# Altium PCB BikeHUD_PCB_Rev1.PcbDoc
Units mm, origin at the board's own origin, x right, y up, seen from the top; angles counter-clockwise.
Board outline 70.5 x 60.9 mm, 2 copper layers (Top Layer, Bottom Layer); 15 components, 33 nets, 157 pads, 42 vias.
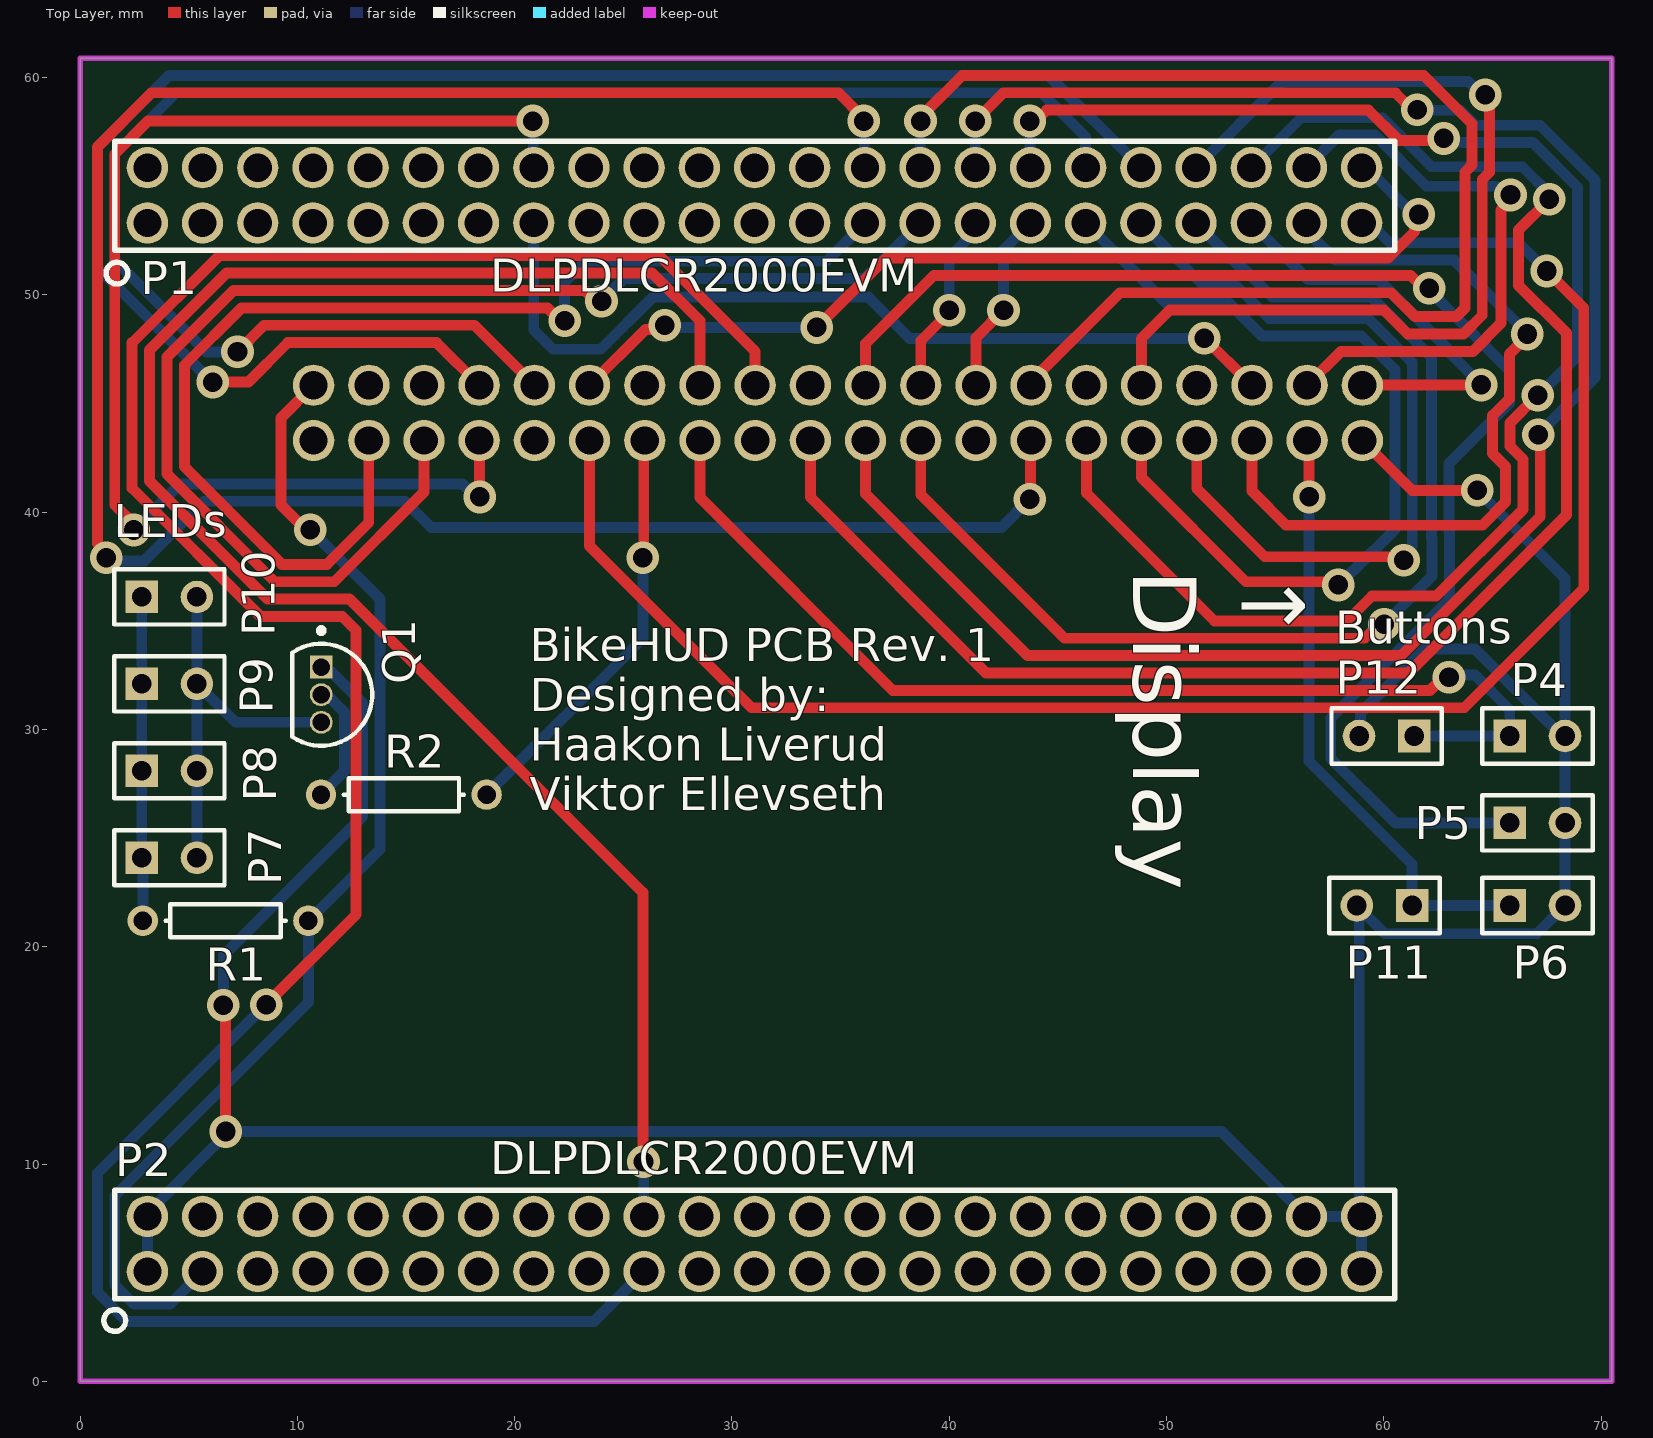
[diagram p0: Top Layer view]
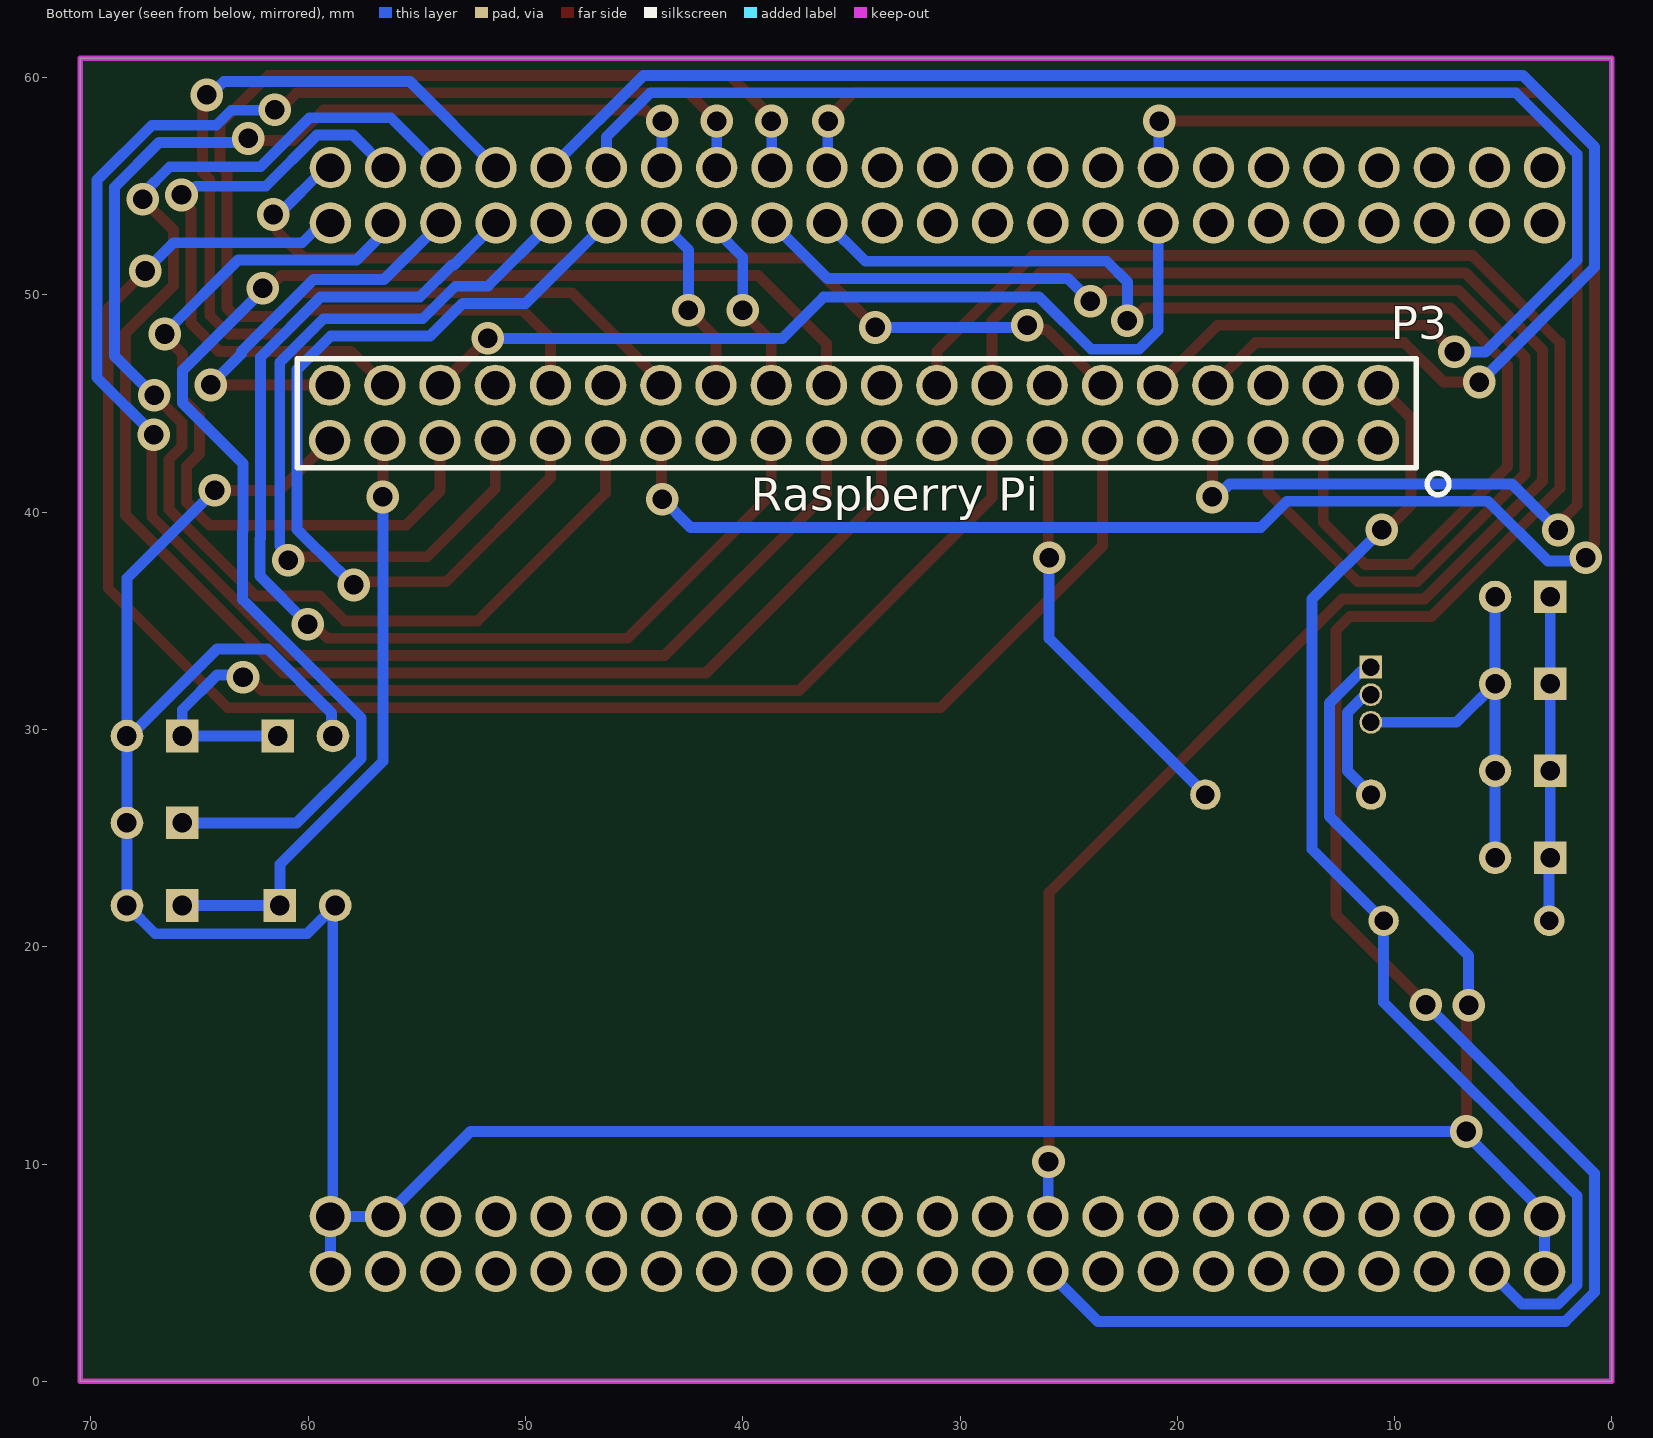
[diagram p1: Bottom Layer view, seen from below]

## Layer stack, top to bottom
Top Solder: solder mask 0.0102, Solder Resist, Dk 3.5
Top Layer: signal copper 0.0356
Dielectric 1: dielectric 0.32, FR-4, Dk 4.8
Bottom Layer: signal copper 0.0356
Bottom Solder: solder mask 0.0102, Solder Resist, Dk 3.5

## Board outline
0,0 0,60.9 70.5,60.9 70.5,0

## Design rules (kind name [scope] priority, off if disabled: settings)
Clearance [All] p1: gap=0.3 ignorepadtopadclearanceinfootprint=FALSE except(0: Arc-Hole Track-Hole SMDPad-Hole THPad-Hole Via-Hole Fill-Hole Poly-Hole Region-Hole Text-Hole)
HoleSize [All] p1: absolutevalues=TRUE maxlimit=0.9 minlimit=0.9 maxpercent=80.000 minpercent=20.000
PolygonConnect [All] p1: connectstyle=Relief reliefconductorwidth=0.254 reliefentries=4 polygonreliefangle="90 Angle" airgapwidth=0.254
RoutingVias [All] p1: holewidth=0.9 width=1.5 viastyle="Through Hole" minholewidth=0.9 minwidth=1.3 maxholewidth=0.9 maxwidth=2
SolderMaskExpansion [All] p1: expansion=0.102 istentingtop=FALSE
Width [All] p1: maxlimit=1 minlimit=0.3 preferedwidth=0.5
29 further rules are at their usual default settings.

## Components (designator, comment, footprint, x,y, rotation, side; value= is the part's Value field where it differs from the comment)
P1 "2X23 Header" "2X23 hEADER" 3.1,53.313 r90 top
P2 "2X23 Header" "2X23 hEADER" 3.1,5.053 r90 top
P3 "2x20 Header" 2222 10.75,46.3 r270 bottom
P4 "Header 2" HDR1X2 65.8,29.7 r0 top
P5 "Header 2" HDR1X2 65.8,25.7 r0 top
P6 "Header 2" HDR1X2 65.8,21.9 r0 top
P7 "Header 2" HDR1X2 2.84,24.1 r0 top
P8 "Header 2" HDR1X2 2.84,28.1 r0 top
P9 "Header 2" HDR1X2 2.84,32.1 r0 top
P10 "Header 2" HDR1X2 2.84,36.1 r0 top
P11 "Header 2" HDR1X2 61.3,21.9 r180 top
P12 "Header 2" HDR1X2 61.4,29.7 r180 top
Q1 "ONSC-NPN-E1B2C3-3" ONSC-TO-92-3-29-11 11.1,31.6 r270 top
R1 "Res1" AXIAL-0.3 6.7,21.2 r180 top
R2 "Res1" AXIAL-0.3 14.9,27 r180 top

## Footprints (in the part's own frame and the unit in brackets; to place one, negate y for a bottom-side part, rotate by r counter-clockwise, add the part's x,y. Pads: shape width x height; smd on the part's side, far side on the other; paste and mask are expansions set on the pad)
"2X23 hEADER" [mm]
  round 1.9 hole 1.3: 1(0,0) 2(2.54,0) 3(0,-2.54) 4(2.54,-2.54) 5(0,-5.08) 6(2.54,-5.08) 7(0,-7.62) 8(2.54,-7.62) 9(0,-10.16) 10(2.54,-10.16) 11(0,-12.7) 12(2.54,-12.7) 13(0,-15.24) 14(2.54,-15.24) 15(0,-17.78) 16(2.54,-17.78) 17(0,-20.32) 18(2.54,-20.32) 19(0,-22.86) 20(2.54,-22.86) 21(0,-25.4) 22(2.54,-25.4) 23(0,-27.94) 24(2.54,-27.94) 25(0,-30.48) 26(2.54,-30.48) 27(0,-33.02) 28(2.54,-33.02) 29(0,-35.56) 30(2.54,-35.56) 31(0,-38.1) 32(2.54,-38.1) 33(0,-40.64) 34(2.54,-40.64) 35(0,-43.18) 36(2.54,-43.18) 37(0,-45.72) 38(2.54,-45.72) 39(0,-48.26) 40(2.54,-48.26) 41(0,-50.8) 42(2.54,-50.8) 43(0,-53.34) 44(2.54,-53.34) 45(0,-55.88) 46(2.54,-55.88)
  silkscreen extent -2.81,-57.4 3.75,1.9, body extent -1.18,-57.43 3.78,1.5, height 8.51
2222 [mm]
  round 1.9 hole 1.3: 1(3,0) 2(0.46,0) 3(3,-2.54) 4(0.46,-2.54) 5(3,-5.08) 6(0.46,-5.08) 7(3,-7.62) 8(0.46,-7.62) 9(3,-10.16) 10(0.46,-10.16) 11(3,-12.7) 12(0.46,-12.7) 13(3,-15.24) 14(0.46,-15.24) 15(3,-17.78) 16(0.46,-17.78) 17(3,-20.32) 18(0.46,-20.32) 19(3,-22.86) 20(0.46,-22.86) 21(3,-25.4) 22(0.46,-25.4) 23(3,-27.94) 24(0.46,-27.94) 25(3,-30.48) 26(0.46,-30.48) 27(3,-33.02) 28(0.46,-33.02) 29(3,-35.56) 30(0.46,-35.56) 31(3,-38.1) 32(0.46,-38.1) 33(3,-40.64) 34(0.46,-40.64) 35(3,-43.18) 36(0.46,-43.18) 37(3,-45.72) 38(0.46,-45.72) 39(3,-48.26) 40(0.46,-48.26)
  silkscreen extent -0.75,-49.75 5.5,3.25, body extent -0.7,-49.7 4.3,1.7, height 11.05
AXIAL-0.3 [mm] "Axial Device, Thru-Hole; 2 Leads; 0.3 in Pin Spacing"
  round 1.4 hole 0.85: 1(-3.81,0) 2(3.81,0)
  silkscreen extent -2.77,-0.76 2.77,0.76
HDR1X2 [mm] "Connector; Header; 2 Position"
  rect 1.5x1.5 hole 0.9: 1(0,0)
  round 1.5 hole 0.9: 2(2.54,0)
  silkscreen extent -1.27,-1.27 3.81,1.27
ONSC-TO-92-3-29-11 [mm] "TO, 3-Leads, Body Dia 4.7mm, Pitch 1.27mm"
  rect 1.05x1.05 hole 0.8: 1(-1.27,0)
  round 1.05 hole 0.8: 2(0,0) 3(1.27,0)
  silkscreen extent -3.07,-1.34 2.35,2.35, body extent -2.35,-1.33 2.36,2.36, height 7.87

## Part data
P1 P2: library part PPPC232LFBN-RC, "Board Connector, 46 Contact(s), 2 Row(s), Female, Straight, 0.1 inch Pitch, Solder Terminal, Locking", Manufacturer=Sullins, Manufacturer Series=PP, Rated Current (Signal)=3A, Supplier Part Number 1=S7126-ND, Body Breadth=0.197inch, Body Depth=0.334inch, Body Length=2.32inch, Category=Connectors, ComponentLink1Description=https://datasheet.ciiva.com:443/pdfs/VipMasterIC/IC/SUCS/SUCSS00270/SUCSS00270-1.pdf?src-supplier=IHS+Markit, ComponentLink1URL=https://datasheet.ciiva.com:443/pdfs/VipMasterIC/IC/SUCS/SUCSS00270/SUCSS00270-1.pdf?src-supplier=IHS+Markit, ComponentLink2Description=https://media.digikey.com/pdf/Data%20Sheets/Sullins%20PDFs/Female_Headers.100_DS.pdf?src-supplier=Digi-Key, ComponentLink2URL=https://media.digikey.com/pdf/Data%20Sheets/Sullins%20PDFs/Female_Headers.100_DS.pdf?src-supplier=Digi-Key, Connector Type="BOARD CONNECTOR", Contact Finish - Mating=AU, Contact Gender=Female, Contact Material=Bronze, Contact Pattern=RECTANGULAR, Contact Style="SQ PIN-SKT", Insulation Material=Polyester, Manufacturer Part Number=PPPC232LFBN-RC, Mating Contact Pitch=0.1inch, Mating Contact Row Spacing=0.1inch, Mount=Board, Mounting Option 1=LOCKING, Mounting Style=STRAIGHT, Number Of Connectors=1, Number of Contacts=46, Number Of PCB Rows=2, Number of Rows Loaded=2, PCB Contact Pattern=RECTANGULAR, PCB Contact Row Spacing=2.54mm, Polarization Key="POLARIZED HOUSING", Pricing 1="1=2,43000, 10=2,20600, 80=1,94400, 440=1,65241, 1000=1,40940, 5000=1,40400 (USD)", REACH SVHC=Yes, Reference Standard=UL, Reliability=COMMERCIAL, RoHS=Yes, RoHS Compliant=Yes, Stock 1=3254, Supplier 1=Digi-Key, Terminal Length=0.125inch, Terminal Pitch=2.54mm, Termination=Solder
P3: library part 2222, "GPIO FEMALE HEADER RASPBERRY PI", Manufacturer="Adafruit Industries", Supplier Part Number 1=1528-1785-ND, ComponentLink1Description=https://cdn-shop.adafruit.com/product-files/2222/00587.pdf?src-supplier=Digi-Key, ComponentLink1URL=https://cdn-shop.adafruit.com/product-files/2222/00587.pdf?src-supplier=Digi-Key, Manufacturer Part Number=2222, Pricing 1="1=1,50000 (USD)", RoHS=No, Stock 1=1603, Supplier 1=Digi-Key
P4 P5 P6 P7 P8 P9 P10 P11 P12: "Header, 2-Pin", LatestRevisionDate=17-Jul-2002, LatestRevisionNote="Re-released for DXP Platform.", Publisher="Altium Limited"
R1 R2: "Resistor", LatestRevisionDate=17-Jul-2002, LatestRevisionNote="Re-released for DXP Platform.", PackageDescription="Axial Device, Thru-Hole; 2 Leads; 0.3 in Pin Spacing", PackageReference=AXIAL-0.3, Published=8-Jun-2000, Publisher="Altium Limited"

## Via types
v1: diameter 1.5, hole 0.9, Top Layer to Bottom Layer, 42 vias

## Nets (pads, with @x,y where several pads share a name; then routed paths per layer and width w, separated by ;. In a path a pad name is that pad's centre, name@x,y a point inside that pad or via, vN(x,y) a via of type N, cw(c..) or ccw(c..) an arc to the next point about the centre after c; other vN are vias at no path point)
0V: P2.1 P2.2 P2.44 P2.45 P2.46 P3.39 P4.2 P5.2 P6.2 P11.2 P12.2 Q1.1 | length 154.5
  Top Layer w0.5: v1(6.7,11.5) v1@6.7,17.3 ; P3.39 61.31,41 v1(64.3,41)
  Bottom Layer w0.5: P2.1 3.1,7.746 6.7,11.346 v1(6.7,11.5) 52.533,11.5 P2.44 P2.46 ; v1(6.6,17.3) 6.6,19.6 13,26 13,31.22 11.545,32.675 11.295,32.675 Q1.1 ; P11.2 P11.2@58.87,21.79 ; P12.2 58.921,29.761 58.921,30.76 61.862,33.7 64.2,33.7 67.943,29.957 P4.2@68.298,29.957 ; P2.45 P2.46 ; v1(64.3,41) 68.34,36.96 P5.2 P6.2 67.04,20.6 60.06,20.6 P11.2@58.87,21.79 ; P11.2@58.87,21.79 58.87,7.703 P2.46
BTN1: P3.15 P4.1 P12.1 | length 49.5
  Top Layer w0.5: P3.15@28.53,42.7 28.53,40.67 37.4,31.8 62.129,31.8 62.729,32.4 v1(63,32.4)
  Bottom Layer w0.5: P12.1 P4.1 65.793,29.707 65.793,30.907 64.2,32.5 63.1,32.5 v1(63,32.4)
BTN2: P3.22 P5.1 | length 66.1
  Top Layer w0.5: P3.22@36.15,45.24 36.15,47.75 39.3,50.9 48.005,50.9 61.229,50.9 61.829,50.3 v1(62.1,50.3)
  Bottom Layer w0.5: v1(62.1,50.3) 62.1,50.2 65.781,46.519 65.781,45.026 63,42.246 63,39.127 63.019,39.108 63.019,35.989 57.56,30.53 57.56,28.671 60.531,25.7 P5.1
BTN3: P3.37 P6.1 P11.1 | length 27.2
  Top Layer w0.5: v1(56.564,40.7) P3.37@56.564,42.606
  Bottom Layer w0.5: v1(56.564,40.7) 56.564,28.536 61.3,23.8 P11.1 P6.1
Data0: P1.45 P3.11 | length 80.3
  Top Layer w0.5: P3.11@23.45,42.877 23.45,38.45 30.9,31 63.7,31 69.2,36.5 69.2,49.4 v1(67.5,51.1)
  Bottom Layer w0.5: P1.45 59.359,53.313 60.272,52.4 66.2,52.4 v1(67.5,51.1)
Data1: P1.46 P3.12 | length 45.4
  Top Layer w0.5: P3.12 26.019,48.409 26.709,48.409 v1(26.9,48.6) ; v1(33.9,48.5) 37.1,51.7 60.2,51.7 61.409,52.909 61.409,53.509 v1(61.6,53.7)
  Bottom Layer w0.5: v1(26.9,48.6) 27,48.5 v1(33.9,48.5) ; P1.46 59.213,55.853 61.367,53.7 v1(61.6,53.7)
Data2: P1.43 P3.35 | length 35.7
  Top Layer w0.5: P3.35@53.93,42.7 53.93,40.97 55.5,39.4 64.538,39.4 65.6,40.462 65.6,42.101 65,42.701 65,44.441 65.781,45.221 65.781,47.281 66.6,48.1 v1(66.6,48.2)
  Bottom Layer w0.5: P1.43 56.44,52.934 57.774,51.6 63.232,51.6 66.6,48.232 v1(66.6,48.2)
Data3: P1.44 P3.38 | length 27.3
  Top Layer w0.5: P3.38 58.03,47.4 64.1,47.4 65.4,48.7 65.4,53.898 65.83,54.327 v1(65.83,54.598)
  Bottom Layer w0.5: P1.44 57.94,57.353 59.601,57.353 61.954,55 65.157,55 65.559,54.598 v1(65.83,54.598)
Data4: P1.41 P3.40 | length 19.2
  Top Layer w0.5: P3.40 59.017,45.847 64.474,45.847 v1(64.481,45.854)
  Bottom Layer w0.5: P1.41 56.513,50.7 59.762,50.7 63.063,47.399 63.063,47.291 64.481,45.873 v1(64.481,45.854)
Data5: P1.42 P3.19 | length 75.6
  Top Layer w0.5: P3.19@33.61,42.7 33.61,40.69 41.7,32.6 61.133,32.6 68.4,39.867 68.4,48.238 66.2,50.438 66.2,52.978 v1(67.618,54.397)
  Bottom Layer w0.5: P1.42 56.2,58.153 59.933,58.153 62.188,55.898 66.368,55.898 67.618,54.648 v1(67.618,54.397)
Data6: P1.39 P3.23 | length 52.8
  Top Layer w0.5: P3.23@38.69,42.7 38.69,40.81 45.3,34.2 59.121,34.2 59.755,34.834 v1(60.026,34.834)
  Bottom Layer w0.5: P1.39 53.295,51.378 53.385,51.378 54.863,49.9 59.43,49.9 62.2,47.13 62.2,38.796 62.219,38.776 62.219,37.058 60.026,34.864 v1(60.026,34.834)
Data7: P1.40 P3.32 | length 44.8
  Top Layer w0.5: P3.32 48.85,48 50.15,49.3 60,49.3 61.1,48.2 63.67,48.2 64.53,49.06 64.53,55.308 64.862,55.641 64.862,59.015 v1(64.677,59.2)
  Bottom Layer w0.5: P1.40 55.321,59.814 63.884,59.814 64.498,59.2 v1(64.677,59.2)
Data8: P1.37 P3.33 | length 36.9
  Top Layer w0.5: P3.33@51.39,42.7 51.39,41.083 54.523,37.95 60.75,37.95 v1(60.919,37.781)
  Bottom Layer w0.5: P1.37 51.733,50.4 53.231,50.4 54.728,48.903 59.296,48.903 61.31,46.889 61.31,38.442 60.919,38.051 v1(60.919,37.781)
Data9: P1.38 P3.8 | length 78
  Top Layer w0.5: v1(6.1,45.988) 7.749,45.988 9.56,47.8 16.41,47.8 P3.8
  Bottom Layer w0.5: v1(6.1,45.988) 6.08,45.988 0.8,51.269 0.8,56.806 4.094,60.1 44.573,60.1 P1.38
Data10: P1.36 P3.10 | length 75.7
  Top Layer w0.5: v1(7.248,47.374) 8.474,48.6 18.15,48.6 P3.10
  Bottom Layer w0.5: v1(7.248,47.374) 5.826,47.374 1.6,51.6 1.6,56.474 4.426,59.3 44.242,59.3 46.28,57.262 P1.36
Data11: P1.34 P3.29 | length 72.2
  Top Layer w0.5: v1(43.7,58) 43.971,58 44.471,58.5 59.3,58.5 60.7,57.1 62.664,57.1 v1(62.762,57.198) ; P3.29@46.31,42.9 46.31,40.89 52.2,35 58.314,35 59.448,36.134 62.404,36.134 66.4,40.13 66.4,42.432 65.8,43.032 65.8,44.109 v1(67.081,45.39)
  Bottom Layer w0.5: v1(43.7,58) 43.72,57.98 43.72,55.873 P1.34 ; v1(62.762,57.198) 62.953,57.007 66.862,57.007 68.918,54.95 68.918,47.189 67.119,45.39 v1(67.081,45.39)
Data12: P1.35 P3.31 | length 40.2
  Top Layer w0.5: P3.31@48.85,42.7 48.85,41.6 53.65,36.8 57.75,36.8 v1(57.9,36.65)
  Bottom Layer w0.5: P1.35 49.993,49.6 52.9,49.6 54.397,48.103 58.964,48.103 60.51,46.557 60.51,39.21 58.611,37.311 58.581,37.311 57.921,36.65 v1(57.9,36.65)
Data13: P1.33 P3.26 | length 9.1
  Top Layer w0.5: P3.26@41.23,45.24 41.23,48.03 v1(42.5,49.3)
  Bottom Layer w0.5: v1(42.5,49.3) 42.5,52.073 P1.33
Data14: P1.31 P3.24 | length 9.1
  Top Layer w0.5: P3.24@38.69,45.24 38.69,47.89 40,49.2 v1(40,49.3)
  Bottom Layer w0.5: v1(40,49.3) 40,51.734 41.2,52.934 P1.31
Data15: P1.32 P3.21 | length 88.3
  Top Layer w0.5: P3.21@36.15,42.9 36.15,40.85 43.6,33.4 60.801,33.4 67.2,39.799 67.2,43.471 v1(67.1,43.571) ; v1(41.2,58) 42.5,59.3 60.529,59.3 61.315,58.514 v1(61.534,58.514)
  Bottom Layer w0.5: P1.32 v1(41.2,58) ; v1(61.534,58.514) 61.55,58.498 63.54,58.498 64.231,57.807 67.193,57.807 69.718,55.282 69.718,46.189 v1(67.1,43.571)
Data16: P1.15 P3.36 | length 40.9
  Top Layer w0.5: v1(51.739,48) 51.754,48 53.815,45.939 P3.36@53.815,45.924
  Bottom Layer w0.5: P1.15 20.88,48.382 21.762,47.5 23.962,47.5 26.362,49.9 36.278,49.9 38.178,48 v1(51.739,48)
Data17: P1.16 P3.7 | length 58.8
  Top Layer w0.5: v1(2.481,39.181) 2.481,39.451 1.6,40.332 1.6,56.474 3.126,58 v1(20.84,58) ; P3.7@18.335,42.7 18.385,42.65 18.385,40.715 v1(18.4,40.7)
  Bottom Layer w0.5: v1(2.481,39.181) 4.6,41.3 17.607,41.3 18.207,40.7 v1(18.4,40.7) ; v1(20.84,58) 20.86,57.98 20.86,55.873 P1.16
DATAEN: P1.30 P3.28 | length 60.3
  Top Layer w0.5: v1(38.68,58) 38.68,58.18 40.6,60.1 61.838,60.1 64.062,57.876 64.062,55.972 63.73,55.64 63.73,49.391 63.338,49 61.431,49 60.331,50.1 47.862,50.1 P3.28@43.77,46.008
  Bottom Layer w0.5: P1.30 38.67,55.863 38.67,57.99 v1(38.68,58)
EXT_SCL: P2.19 P3.18 | length 116.1
  Top Layer w0.5: v1(8.562,17.338) 12.7,21.477 12.7,34.569 12.069,35.2 8.3,35.2 2.4,41.1 2.4,47.8 6.413,51.813 26.657,51.813 31.07,47.4 P3.18@31.07,45.24
  Bottom Layer w0.5: v1(8.562,17.338) 0.8,9.577 0.8,4.1 2.147,2.753 23.66,2.753 P2.19
EXT_SDA: P2.20 P3.16 | length 82.4
  Top Layer w0.5: v1(25.93,10.1) 25.9,10.13 25.9,22.5 12.4,36 8.631,36 3.2,41.431 3.2,47.469 6.744,51.013 26.325,51.013 28.53,48.808 P3.16@28.53,45.619
  Bottom Layer w0.5: v1(25.93,10.1) 25.945,10.085 25.945,7.608 P2.20
HSYNC: P1.29 P3.5 | length 60.6
  Top Layer w0.5: P3.5@15.83,42.923 15.83,40.93 11.7,36.8 8.963,36.8 4,41.763 4,47.137 7.063,50.2 23.242,50.2 23.729,49.713 v1(24,49.713)
  Bottom Layer w0.5: v1(24,49.713) 25.037,50.75 36.097,50.75 P1.29
LED_CTRL: P3.13 R2.1 | length 18.6
  Top Layer w0.5: v1(25.9,37.9) 25.945,37.945 25.945,42.565 P3.13@25.9,42.61
  Bottom Layer w0.5: R2.1 25.9,34.19 v1(25.9,37.9)
NetP7_1: P7.1 P8.1 P9.1 P10.1 R1.2 | length 14.9
  Bottom Layer w0.5: P10.1 P9.1 P8.1 P7.1 2.89,24.05 R1.2
NetP7_2: P7.2 P8.2 P9.2 P10.2 Q1.3 | length 18.5
  Bottom Layer w0.5: P7.2 P8.2 P9.2 ; P10.2 P9.2 ; Q1.3 7.15,30.33 P9.2
NetQ1_2: Q1.2 R2.2 | length 5.6
  Bottom Layer w0.5: R2.2 12.175,28.085 12.175,30.775 11.456,31.495 11.205,31.495 Q1.2
PCLK: P1.28 P3.27 | length 105
  Top Layer w0.5: v1(1.2,37.9) 1.2,38.171 0.8,38.571 0.8,56.806 3.294,59.3 34.9,59.3 36.06,58.14 v1(36.06,58) ; v1(43.7,40.6) 43.735,40.635 43.735,42.665 P3.27@43.77,42.7
  Bottom Layer w0.5: v1(1.2,37.9) 1.35,37.75 2.95,37.75 5.7,40.5 14.962,40.5 16.162,39.3 42.4,39.3 v1(43.7,40.6) ; v1(36.06,58) 36.09,57.97 36.09,55.883 P1.28
VINTF: P2.3 P3.2 R1.1 | length 54.1
  Top Layer w0.5: v1(10.6,39.2) 10.375,39.2 9.25,40.325 9.25,44.34 P3.2
  Bottom Layer w0.5: P2.3 4.14,3.553 2.479,3.553 1.6,4.432 1.6,8.538 10.51,17.448 R1.1 13.8,24.49 13.8,36 v1@10.613,39.187
VSYNC: P1.27 P3.3 | length 54.7
  Top Layer w0.5: P3.3@13.29,42.869 13.29,39.521 11.369,37.6 9.3,37.6 4.8,42.1 4.8,46.764 7.436,49.4 21.507,49.4 22.107,48.8 v1(22.3,48.8)
  Bottom Layer w0.5: v1(22.3,48.8) 22.3,50.6 23.25,51.55 34.357,51.55 P1.27
pads on no net: P1.1 P1.2 P1.3 P1.4 P1.5 P1.6 P1.7 P1.8 P1.9 P1.10 P1.11 P1.12 P1.13 P1.14 P1.17 P1.18 P1.19 P1.20 P1.21 P1.22 P1.23 P1.24 P1.25 P1.26 P2.4 P2.5 P2.6 P2.7 P2.8 P2.9 P2.10 P2.11 P2.12 P2.13 P2.14 P2.15 P2.16 P2.17 P2.18 P2.21 P2.22 P2.23 P2.24 P2.25 P2.26 P2.27 P2.28 P2.29 P2.30 P2.31 P2.32 P2.33 P2.34 P2.35 P2.36 P2.37 P2.38 P2.39 P2.40 P2.41 P2.42 P2.43 P3.1 P3.4 P3.6 P3.9 P3.14 P3.17 P3.20 P3.25 P3.30 P3.34

## Keep-outs
Keep-Out Layer:
  the board outline again, w0.254

## Silkscreen, mask and mechanical layers (free items; w line width, h text height)
Top Overlay:
  text "DLPDLCR2000EVM" at 18.889,50.154 h1.52
  text "LEDs" at 1.554,38.854 h1.52
  text "↑ / Display" at 47.5,37.344 h5 r270
  text "Buttons" at 57.754,33.954 h1.52
  text "BikeHUD PCB Rev. 1 / Designed by: / Haakon Liverud / Viktor Ellevseth" at 20.696,26.274 h1.52
  text "DLPDLCR2000EVM" at 18.889,9.538 h1.52
Bottom Overlay:
  text "Raspberry Pi" at 39.633,40.062 h1.52